# Altium PCB NZS_A4954_R2_0.PcbDoc
Units mil, origin at the board's own origin, x right, y up, seen from the top; angles counter-clockwise.
Board outline 1653.54 x 1653.54 mil, 2 copper layers (Top Layer, Bottom Layer); 60 components, 64 nets, 251 pads, 132 vias.
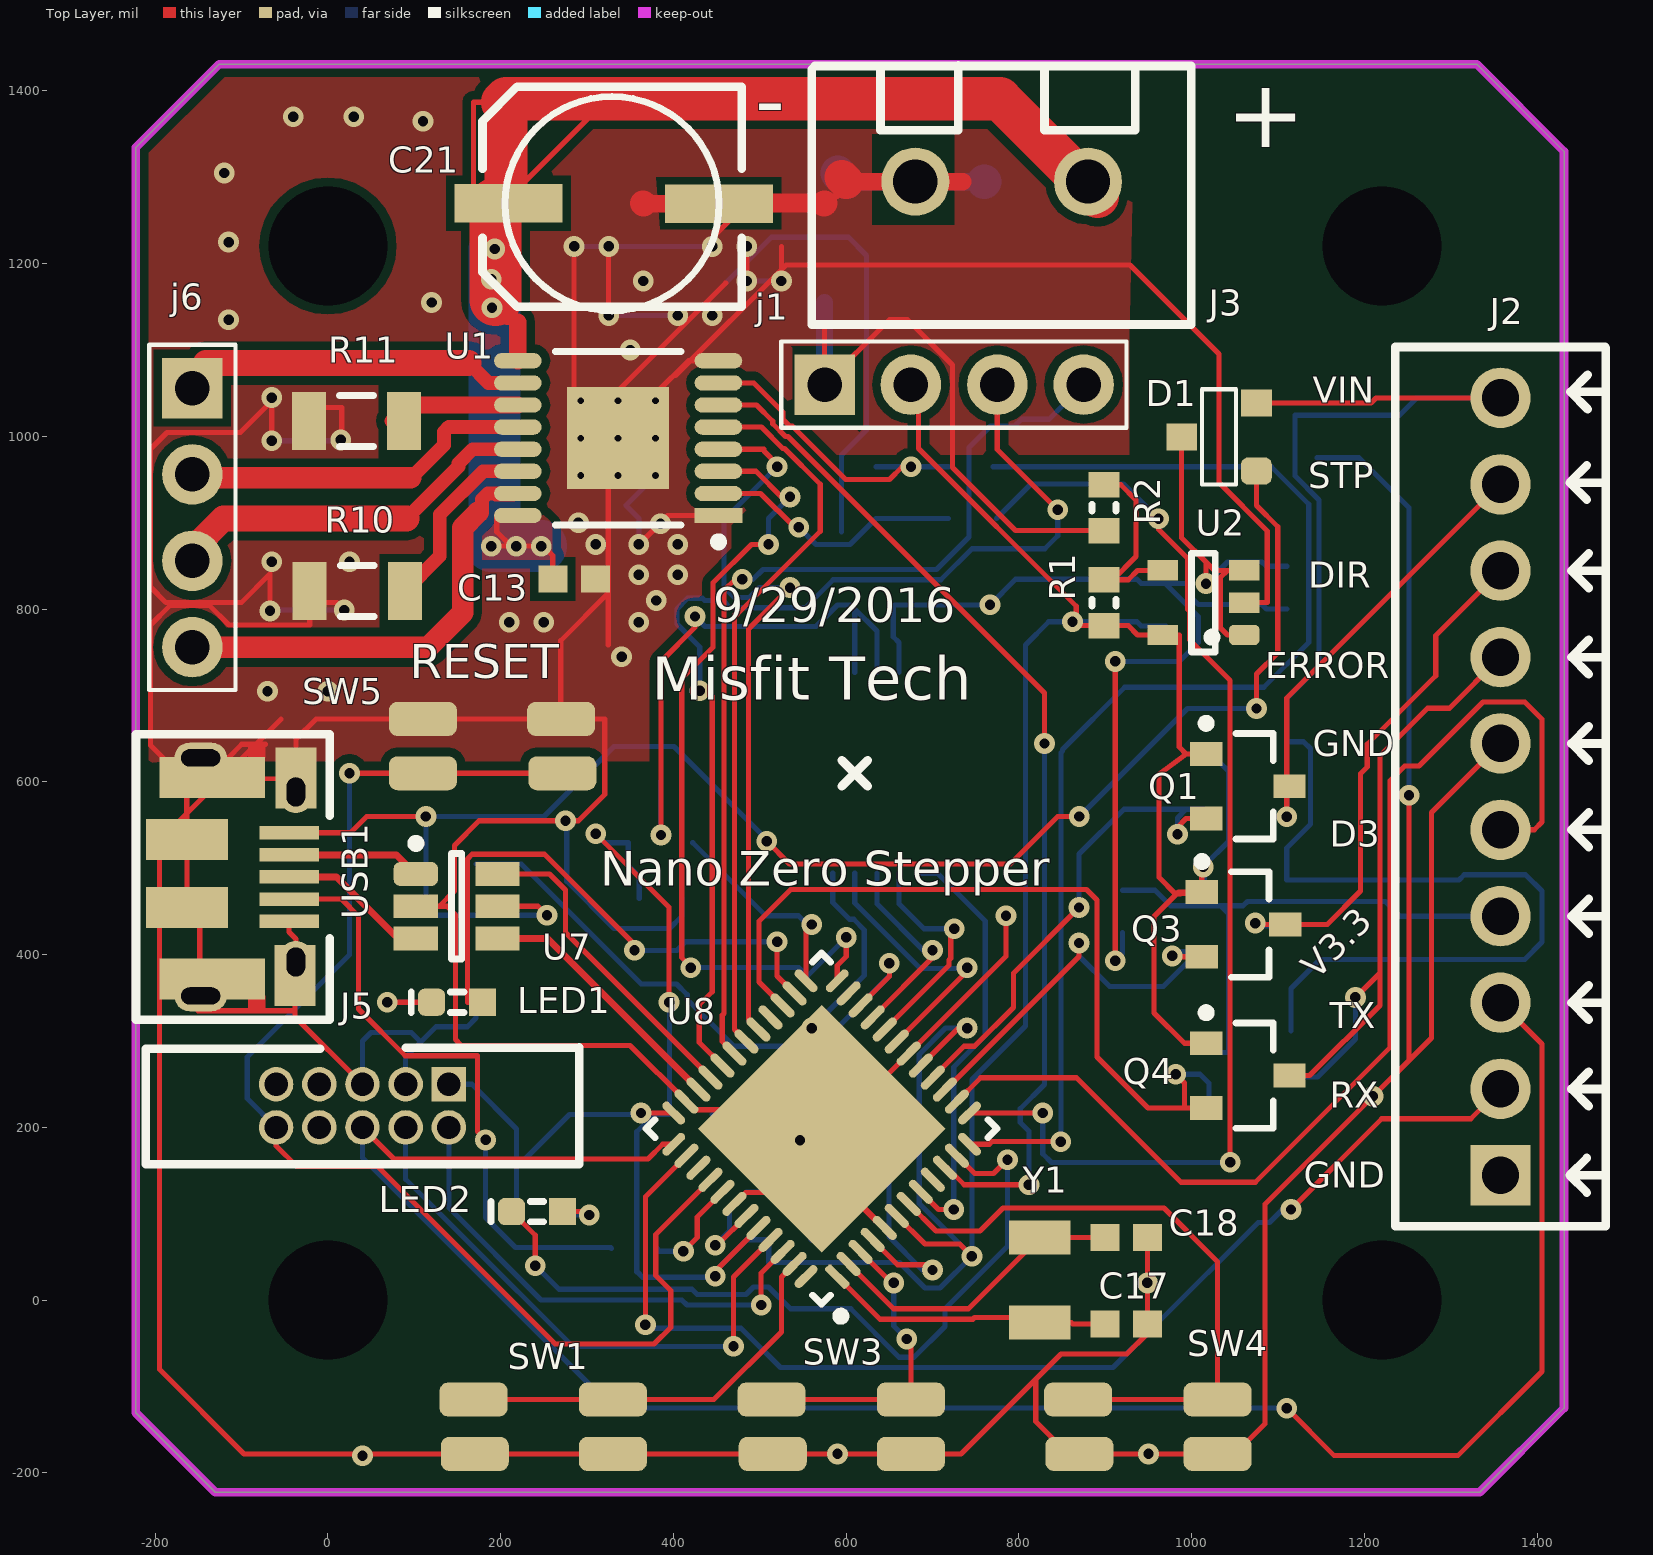
[diagram p0: Top Layer view]
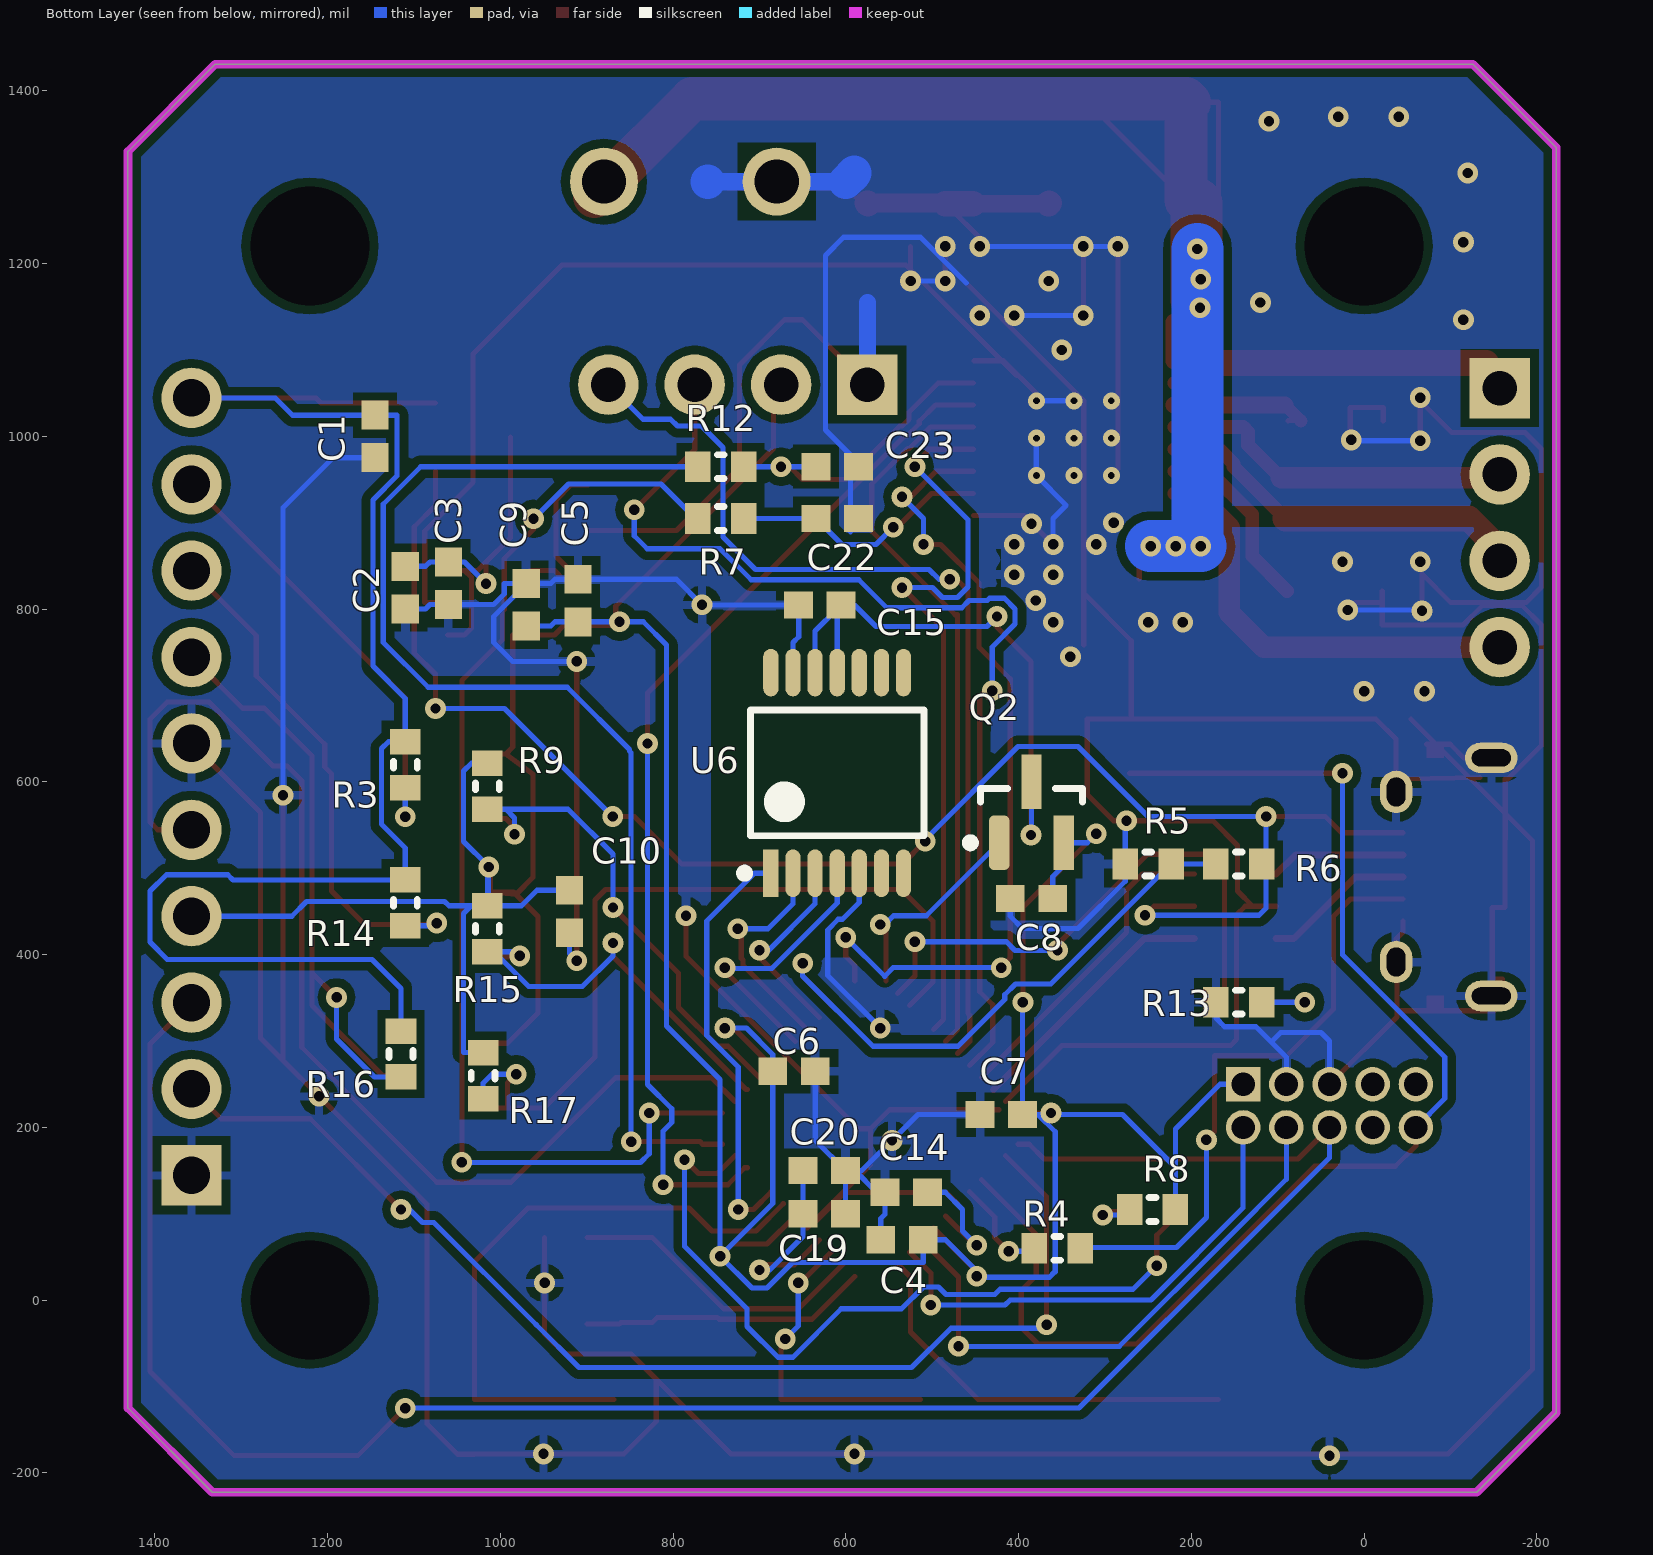
[diagram p1: Bottom Layer view, seen from below]
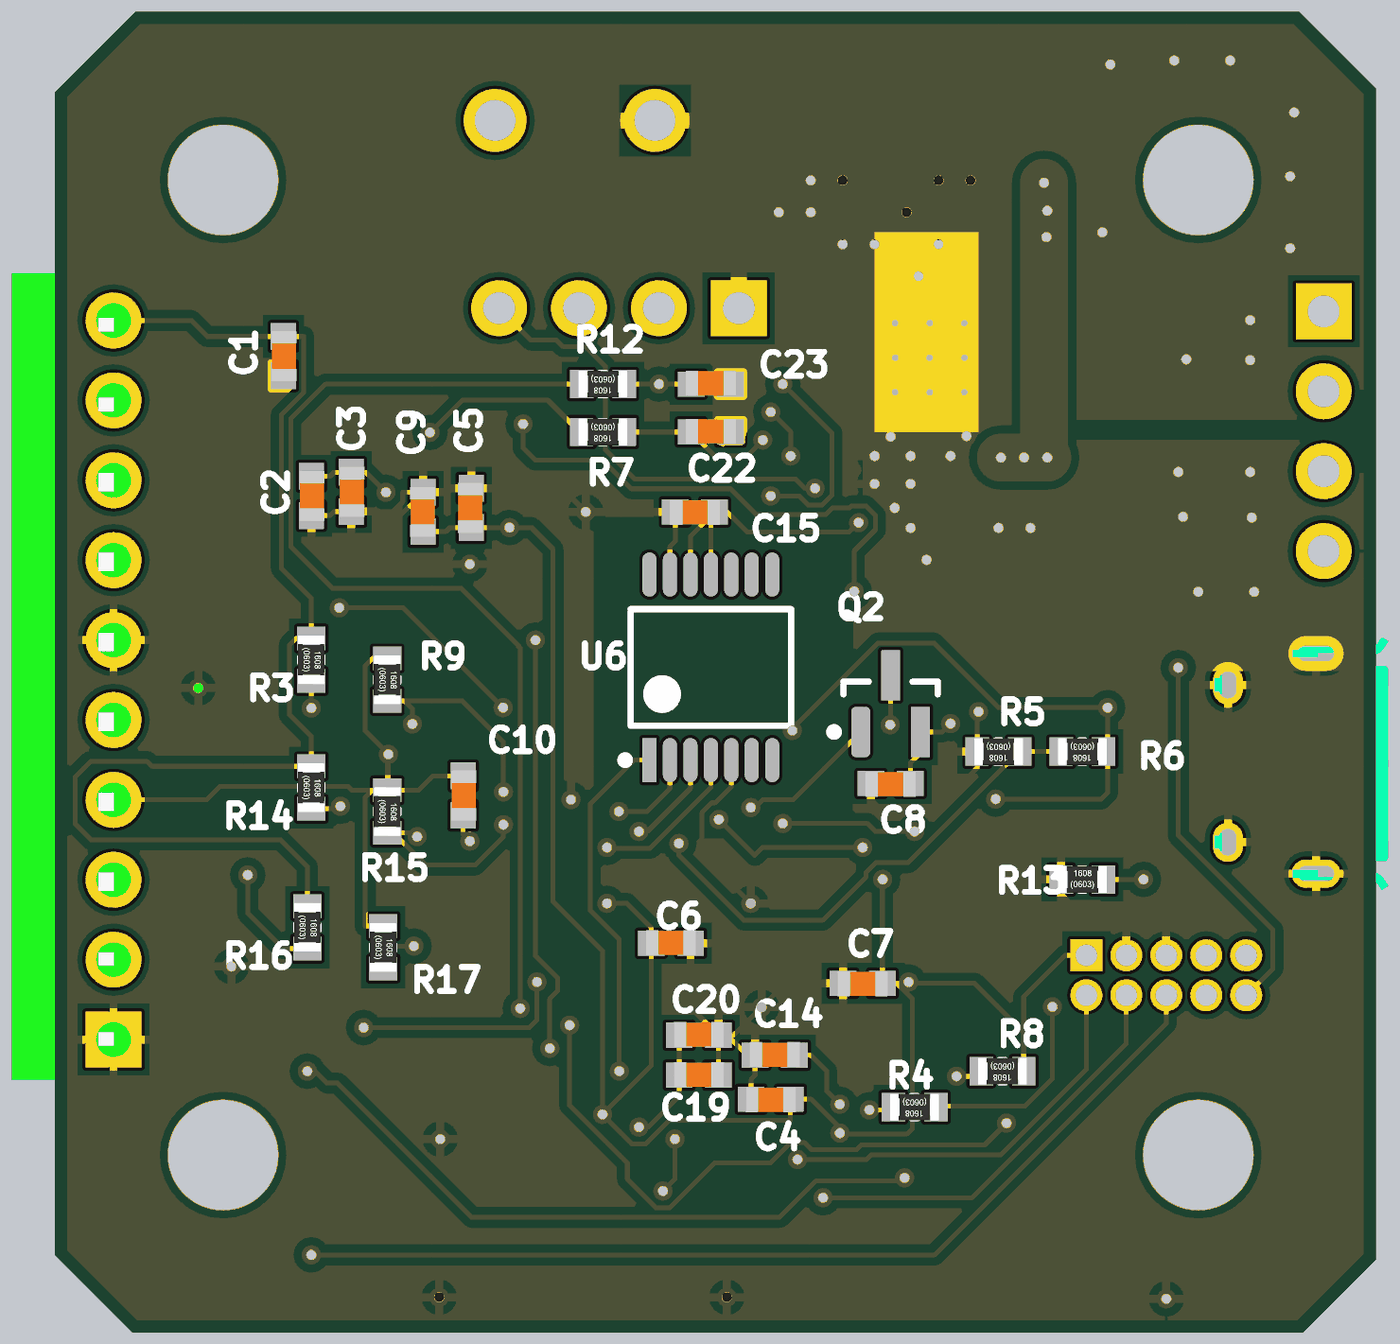
[diagram p2: 3D render of the assembled board from below, using the file's embedded part models]

## Layer stack, top to bottom
Top Solder: solder mask 0.4, Solder Resist, Dk 3.5
Top Layer: signal copper 1.4
Dielectric 1: dielectric 12.6, FR-4, Dk 4.8
Bottom Layer: signal copper 1.4
Bottom Solder: solder mask 0.4, Solder Resist, Dk 3.5

## Board outline
-130.44,-222.44 -222.44,-130.44 -222.44,1334.56 -125.9,1431.1 1330.02,1431.1 1431.1,1330.02 1431.1,-124.9 1333.56,-222.44

## Design rules (kind name [scope] priority, off if disabled: settings)
Clearance Clearance_1 [InNamedPolygon('Bottom Layer-GND')] p1: gap=15
Clearance [All] p2: gap=10 except(6: Track-Track Track-SMDPad Track-Via SMDPad-SMDPad)
MinimumSolderMaskSliver [All] p1: minsoldermaskwidth=1
PolygonConnect PolygonConnect_6 [All vs IsNamedPolygon('GND_bot')] p1: connectstyle=Direct reliefconductorwidth=10 reliefentries=4 polygonreliefangle="90 Angle" airgapwidth=10
PolygonConnect PolygonConnect_5 [All vs IsNamedPolygon('GND_bot')] p2: connectstyle=NoConnect reliefconductorwidth=10 reliefentries=4 polygonreliefangle="90 Angle" airgapwidth=10
PolygonConnect PolygonConnect_4 [All vs IsNamedPolygon('vmot')] p3: connectstyle=Direct reliefconductorwidth=10 reliefentries=4 polygonreliefangle="90 Angle" airgapwidth=10
PolygonConnect PolygonConnect_3 [All vs IsNamedPolygon('Top_GND')] p4: connectstyle=Direct reliefconductorwidth=10 reliefentries=4 polygonreliefangle="90 Angle" airgapwidth=10
PolygonConnect PolygonConnect_2 [All vs IsNamedPolygon('NETJ6-4')] p5: connectstyle=Direct reliefconductorwidth=10 reliefentries=4 polygonreliefangle="90 Angle" airgapwidth=10
PolygonConnect PolygonConnect_1 [All vs IsNamedPolygon('NETJ6-4')] p6: connectstyle=Relief reliefconductorwidth=10 reliefentries=4 polygonreliefangle="90 Angle" airgapwidth=10
PolygonConnect [All] p7: connectstyle=Relief reliefconductorwidth=10 reliefentries=4 polygonreliefangle="90 Angle" airgapwidth=10
RoutingVias [All] p1: holewidth=12 width=24 viastyle="Through Hole" minholewidth=12 minwidth=24 maxholewidth=28 maxwidth=50
SilkToSilkClearance [All] p1: silktosilkclearance=0
SilkToSolderMaskClearance [IsPad] p1: minsilkscreentomaskgap=1 clearancetoexposedcopper=TRUE
SolderMaskExpansion [All] p1: expansion=4
Width [All] p1: maxlimit=100 minlimit=6 preferedwidth=6
27 further rules are at their usual default settings.

## Components (designator, comment, footprint, x,y, rotation, side; value= is the part's Value field where it differs from the comment)
C1 "0.1uF" CAP_0603_H 1145,1000 r270 bottom
C2 "4.7uF" CAP_0603_H 1110,825 r270 bottom
C3 "0.1uF" CAP_0603_H 1060,830 r270 bottom
C4 "0.1uF" CAP_0603_H 535,70 r0 bottom
C5 "4.7uF" CAP_0603_H 910,810 r90 bottom
C6 "0.1uF" CAP_0603_H 660,265 r180 bottom
C7 "0.1uF" CAP_0603_H 420,215 r0 bottom
C8 "0.1uF" CAP_0603_H 385,465 r0 bottom
C9 "0.1uF" CAP_0603_H 970,805 r90 bottom
C10 "0.1uF" CAP_0603_H 920,450 r270 bottom
C13 "0.1uF" CAP_0603_H 285,835 r0 top
C14 "1uF" CAP_0603_H 530,125 r180 bottom
C15 "0.1uF" CAP_0603_H 630,805 r0 bottom
C17 "10pF" CAP_0603_H 924.13,-27.44 r0 top
C18 "10pF" CAP_0603_H 924.13,72.56 r0 top
C19 "4.7uF" CAP_0603_H 625,100 r180 bottom
C20 "0.1uF" CAP_0603_H 625,150 r180 bottom
C21 "100uF" UWT1V101MCL1GS 329,1270 r0 top
C22 "0.1uF" CAP_0603_H 610,905 r180 bottom
C23 "0.1uF" CAP_0603_H 610,965 r180 bottom
D1 "BAT-64-05W-E6327" BAT-64-05W-E6327 1075,960 r180 top
j1 "4_pin_100mils" 4_pin_100mils 875,1060 r90 top
J2 "OSTVN10A150" OSTVN10A150 1357.56,144.56 r90 top
J3 "OSTTC022162" OSTTC022162 880,1295 r270 top
J5 "Cortex_Debug" FTSH-105-01-L-D 40,225 r0 top
j6 "4_pin_100mils" 4_pin_100mils -157,756 r0 top
LED1 "LTST-C190KRKT" LTST-C190KRKT 120,345 r0 top
LED2 "LTST-C190KSKT" LTST-C190KSKT 212.56,102.56 r0 top
Q1 "BSS138" BSS138 1065,595 r0 top
Q2 "IRLML6401TRPBF" IRLML6401TRPBF_M 385,565 r90 bottom
Q3 "BSS138" BSS138 1060,435 r0 top
Q4 "BSS138" BSS138 1065,260 r0 top
R1 "DNP" RES_0603_H 898.56,807.56 r270 top
R2 "DNP" RES_0603_H 898.56,917.56 r90 top
R3 "10K" RES_0603_H 1110,620 r90 bottom
R4 "330" RES_0603_H 355,60 r180 bottom
R5 "10K" RES_0603_H 250,505 r180 bottom
R6 "5.1K" RES_0603_H 145,505 r180 bottom
R7 "1K" RES_0603_H 745,905 r180 bottom
R8 "1K" RES_0603_H 245,105 r180 bottom
R9 "10K" RES_0603_H 1015,595 r90 bottom
R10 "0.2" RES_1206_H 34,821 r180 top
R11 "0.2" RES_1206_H 33,1018 r180 top
R12 "1K" RES_0603_H 745,965 r180 bottom
R13 "1K" RES_0603_H 145,345 r0 bottom
R14 "10K" RES_0603_H 1110,460 r90 bottom
R15 "10K" RES_0603_H 1015,430 r90 bottom
R16 "10K" RES_0603_H 1115,285 r90 bottom
R17 "10K" RES_0603_H 1020,260 r90 bottom
SW1 "KMR231NG LFS" KMR231NG_LFS 330,-115 r180 top
SW3 "KMR231NG LFS" KMR231NG_LFS 675,-115 r180 top
SW4 "KMR231NG LFS" KMR231NG_LFS 1030,-115 r180 top
SW5 "KMR231NG LFS" KMR231NG_LFS 110,610 r0 top
U1 "A4954" A4954 336,998 r180 top
U2 "SPX5205M5-L" SPX5205M5-L 1013.56,807.56 r180 top
U6 "AS5047D" AS5047D 610,610.47 r90 bottom locked
U7 "USBLC6-2" USBLC6-2SC6 149,456 r0 top
U8 "ATSAMD21G18A-MF" ATSAMD21G18A-MF 571.56,198.56 r135 top
USB1 "10118194-0001LF" 10118194-0001LF -45,490 r270 top
Y1 "CM7V-T1A 32.768kHz 12.5pF 20ppm" FC-135-32.7680KA-A3 824.13,72.56 r270 top

## Footprints (in the part's own frame and the unit in brackets; to place one, negate y for a bottom-side part, rotate by r counter-clockwise, add the part's x,y. Pads: shape width x height; smd on the part's side, far side on the other; paste and mask are expansions set on the pad)
4_pin_100mils [mil]
  rect 70x70 hole 40: 1(0,300)
  round 70 hole 40: 2(0,200) 3(0,100) 4(0,0)
  silkscreen extent -50,-49 50,350
10118194-0001LF [mm]
  rect 0.4x1.75 smd: 1(-1.3,0) 2(-0.65,0) 3(0,0) 4(0.65,0) 5(1.3,0)
  oval 0.9x1.55 hole 0.5 slot 1.15 at 90 deg: 6(-3.5,-2.6) 6(3.5,-2.6)
  rect 1.2x3.1 smd: 6(-2.921,-2.261) 6(2.997,-2.261)
  rect 1.8x1.2 smd: 6(-2.906,0.206) 6(2.896,0.178)
  oval 1.25x0.95 hole 0.55 slot 0.85 at 0 deg: 6(-2.5,0.2) 6(2.5,0.2)
  rect 1.2x2.4 smd: 6(-1.1,-3) 6(0.9,-3)
  Top Layer region: 3.5,-0.7 3.9,-0.7 3.9,-1.2 3.5,-1.2
  Top Layer region: -3.9,-0.7 -3.5,-0.7 -3.5,-1.2 -3.9,-1.2
  silkscreen extent -4.2,-4.5 4.2,1.2, body extent -4.02,-4.9 4.02,0.68, height 2.78
A4954 [mm] "TSOP, 16-Leads, Body 5.50x4.40mm, Pitch 0.65mm, Thermal Pad 3.00x3.00mm, IPC Medium Density"
  rect 1.4x0.45 smd: 1(-2.95,2.275)
  oval 1.4x0.45 smd: 2(-2.95,1.625) 3(-2.95,0.975) 4(-2.95,0.325) 5(-2.95,-0.325) 6(-2.95,-0.975) 7(-2.95,-1.625) 8(-2.95,-2.275) 9(2.95,-2.275) 10(2.95,-1.625) 11(2.95,-0.975) 12(2.95,-0.325) 13(2.95,0.325) 14(2.95,0.975) 15(2.95,1.625) 16(2.95,2.275)
  rect 3x3 smd: 17(0,0)
  silkscreen extent -3.08,-2.55 1.85,3.17, body extent -2.25,-2.55 2.25,2.55, height 1.2
AS5047D [mm] "TSOP, 14-Leads, Body 5.00x4.40mm, Pitch 0.65mm, IPC Medium Density"
  rect 1.4x0.45 smd: 1(-2.95,1.95)
  oval 1.4x0.45 smd: 2(-2.95,1.3) 3(-2.95,0.65) 4(-2.95,0) 5(-2.95,-0.65) 6(-2.95,-1.3) 7(-2.95,-1.95) 8(2.95,-1.95) 9(2.95,-1.3) 10(2.95,-0.65) 11(2.95,0) 12(2.95,0.65) 13(2.95,1.3) 14(2.95,1.95)
  silkscreen extent -3.07,-2.55 1.85,2.85, body extent -2.25,-2.55 2.25,2.55, height 1.2
ATSAMD21G18A-MF [mm] "QFN, 48-Leads, Body 7.00x7.00mm, Pitch 0.50mm, Thermal Pad 5.15x5.15mm, IPC Medium Density"
  rrect50% 0.85x0.25 smd: 1(-3.4,2.75)
  oval 0.9x0.25 smd: 2(-3.375,2.25) 3(-3.375,1.75) 4(-3.375,1.25) 5(-3.375,0.75) 6(-3.375,0.25) 7(-3.375,-0.25) 8(-3.375,-0.75) 9(-3.375,-1.25) 10(-3.375,-1.75) 11(-3.375,-2.25) 26(3.375,-2.25) 27(3.375,-1.75) 28(3.375,-1.25) 29(3.375,-0.75) 30(3.375,-0.25) 31(3.375,0.25) 32(3.375,0.75) 33(3.375,1.25) 34(3.375,1.75) 35(3.375,2.25)
  oval 0.85x0.25 smd: 12(-3.4,-2.75) 25(3.4,-2.75) 36(3.4,2.75)
  oval 0.25x0.85 smd: 13(-2.75,-3.4) 24(2.75,-3.4) 37(2.75,3.4) 48(-2.75,3.4)
  oval 0.25x0.9 smd: 14(-2.25,-3.375) 15(-1.75,-3.375) 16(-1.25,-3.375) 17(-0.75,-3.375) 18(-0.25,-3.375) 19(0.25,-3.375) 20(0.75,-3.375) 21(1.25,-3.375) 22(1.75,-3.375) 23(2.25,-3.375) 38(2.25,3.375) 39(1.75,3.375) 40(1.25,3.375) 41(0.75,3.375) 42(0.25,3.375) 43(-0.25,3.375) 44(-0.75,3.375) 45(-1.25,3.375) 46(-1.75,3.375) 47(-2.25,3.375)
  rect 5.15x5.15 smd: 35(0,0)
  silkscreen extent -4.42,-3.65 3.65,3.65, body extent -3.5,-3.5 3.5,3.5, height 0.9
BAT-64-05W-E6327 [mm] "SOT23, 3-Leads, Body 3.0x2.5mm (max), Pitch 0.95mm, IPC High Density"
  rrect50% 0.9x0.8 smd: 1(0,0)
  rect 0.9x0.8 smd: 2(0,-2) 3(2.2,-1)
  silkscreen extent 0.6,-2.4 1.6,0.4
BSS138 [mm] "SOT23, 3-Leads, Body 2.92x2.40mm, Pitch 0.95mm, IPC Medium Density"
  rect 0.95x0.7 smd: 1(-1.225,0.95) 2(-1.225,-0.95) 3(1.225,0)
  silkscreen extent -1.35,-1.55 0.75,1.97, body extent -0.75,-1.56 0.75,1.56, height 1.2
CAP_0603_H [mm] "Chip Capacitor, 2-Leads, Body 1.6x0.8mm, IPC High Density"
  rect 0.85x0.8 smd: 1(-0.625,0) 2(0.625,0)
  body extent -0.8,-0.38 0.8,0.42, height 0.5
FC-135-32.7680KA-A3 [mm]
  rect 1x1.8 smd: 1(0,0) 2(2.5,0)
  body extent -0.33,-0.84 2.89,0.68, height 0.91
FTSH-105-01-L-D [mil]
  rect 40x40 hole 27: 1(100,25)
  round 40 hole 27: 2(100,-25) 3(50,25) 4(50,-25) 5(0,25) 6(0,-25) 7(-50,25) 8(-50,-25) 9(-100,25) 10(-100,-25)
  silkscreen extent -251,-68 251,67
IRLML6401TRPBF_M [mm] "SOT23, 3-Leads, Body 3.0x2.6mm (max), Pitch 0.95mm, IPC Medium Density"
  rrect50% 1.6x0.6 smd: 1(-0.9,0.95)
  rect 1.6x0.6 smd: 2(-0.9,-0.95) 3(0.9,0)
  silkscreen extent -1.02,-1.5 0.7,1.93, body extent -0.7,-1.52 0.7,1.52, height 1.12
KMR231NG_LFS [mm]
  rrect50% 2x1 smd: 1(0,0) 1(4.1,0) 2(0,1.6) 2(4.064,1.6)
  body extent -0.14,-0.74 4.46,2.26, height 2.1
LTST-C190KRKT [mm] "Chip Capacitor, 2-Leads, Body 1.6x0.8mm, IPC High Density"
  rect 0.8x0.8 smd: A(1.5,0)
  rrect50% 0.8x0.8 smd: K(0,0)
  silkscreen extent -0.6,-0.3 0.95,0.3, body extent -0.05,-0.4 1.55,0.4, height 0.8
LTST-C190KSKT [mm] "Chip Capacitor, 2-Leads, Body 1.6x0.8mm, IPC High Density"
  rect 0.8x0.8 smd: A(1.5,0)
  rrect50% 0.8x0.8 smd: K(0,0)
  silkscreen extent -0.6,-0.3 0.95,0.3, body extent -0.05,-0.4 1.55,0.4, height 0.8
OSTTC022162 [mm]
  round 2 hole 1.3: 1(0,0) 2(0,-5.08)
  silkscreen extent -3.42,-8.12 4.2,3.04
OSTVN10A150 [mil]
  rect 70x70 hole 43.31: 1(0,0)
  round 70 hole 43.31: 2(100,0) 3(200,0) 4(300,0) 5(400,0) 6(500,0) 7(600,0) 8(700,0) 9(800,0) 10(900,0)
  silkscreen extent -59,-122 959,122, body extent -50,-127 959,118, height 340
RES_0603_H [mm] "Chip Resistor, 2-Leads, Body 1.6x0.8mm, IPC High Density"
  rect 0.75x0.9 smd: 1(-0.675,0) 2(0.675,0)
  silkscreen extent -0.1,-0.35 0.1,0.35, body extent -0.78,-0.43 0.78,0.43, height 0.45
RES_1206_H [mm] "Chip Resistor, 2-Leads, Body 3.1x1.6mm, IPC High Density"
  rect 1x1.7 smd: 1(-1.4,0) 2(1.4,0)
  silkscreen extent -0.5,-0.75 0.5,0.75, body extent -1.65,-0.87 1.65,0.88, height 0.6
SPX5205M5-L [mm] "SOT23, 5-Leads, Body 2.9x3.0mm (max), Pitch 0.95mm, IPC High Density"
  rrect50% 0.9x0.6 smd: 1(-1.2,0.95)
  rect 0.9x0.6 smd: 2(-1.2,0) 3(-1.2,-0.95) 4(1.2,-0.95) 5(1.2,0.95)
  silkscreen extent -0.38,-1.45 0.35,1.45, body extent -0.8,-1.45 0.8,1.45, height 1.45
USBLC6-2SC6 [mm] "SOT23, 6-Leads, Body 2.9x1.6mm, Pitch 0.95mm, Lead Span 2.7mm, IPC Low Density"
  rrect50% 1.3x0.7 smd: 1(-1.2,0.95)
  rect 1.3x0.7 smd: 2(-1.2,0) 3(-1.2,-0.95) 4(1.2,-0.95) 5(1.2,0) 6(1.2,0.95)
  silkscreen extent -1.32,-1.55 0.15,1.97, body extent -0.9,-1.55 0.9,1.55, height 1.45
UWT1V101MCL1GS [mil]
  rect 125x45 smd: 1(-120,0) 2(124,-0.57)
  silkscreen extent -150,-125 150,135, body extent -150,-125 150,135, height 315

## Part data
C1 C3 C4 C6 C7 C8 C9 C10 C13 C15 C20 C22 C23: library part altiumdb529bf947b98393.42967747, "CAP CER 0.1UF 50V Y5V 0603"
C2 C5 C19: library part altiumdb4ee8d107ce20d3.65865655, "CAP 0603 CER 4.7UF 6.3V X5R 10%"
C14: library part altiumdb4ee8b0b72ecfe9.85374024, "CAP 0603 CER 1UF 10V X5R 10%"
C17 C18: library part altiumdb4ee8b063d08416.68377278, "CAP 0603 CER 10PF 50V C0G 5%"
C21: library part altiumdb57a880e8344183.38641875, "100uF 35V SMD"
D1: library part altiumdb4f1b209379f822.22085624, "DIODE SCHOTTKY 40V SOT-323 250mA"
j1 j6: library part altiumdb50250c9a771e29.42661008
J2: library part altiumdb567859247e8a11.17618190, "CONN TERM BLOCK 2.54MM 10POS PCB"
J3: library part altiumdb4f85748e7138c0.76964249, "TERM BLOCK 5.08MM VERT 2POS PCB"
J5: library part altiumdb4feb1a682396d4.11944837, "CONN HEADER 10POS DUAL .05&quot; T/H"
LED1: library part altiumdb4f59f5b2e3b411.05953718, "LED SUPER RED CLEAR 0603 SMD 20mA Vf=2V"
LED2: library part altiumdb52dbc15523a908.74373465, "LED YELLOW CLEAR 0603 SMD"
Q1 Q3 Q4: library part altiumdb57eceeefb79952.37783215
Q2: library part altiumdb4f097f24c87689.72269489, "MOSFET P-CH 12V 4.3A SOT-23"
R3 R5 R9 R14 R15 R16 R17: library part altiumdb4ee8dc331cbc98.19926137, "RES 0603 TKF 10K 5% 1/10W"
R4: library part altiumdb4ee8dc965f2f62.61392404, "RES 0603 TKF 330R 5% 1/10W"
R6: library part altiumdb4ee8dcacc79f57.47125618, "RES 0603 TKF 5.1K 1% 1/10W"
R7 R8 R12 R13: library part altiumdb4ee8dc53e1b436.35151719, "RES 0603 TKF 1K 1% 1/10W"
R10 R11: library part altiumdb52db39dc769f41.69333525, "RES 0.2 OHM 0.25W 1% 1206 SMD"
SW1 SW3 SW4 SW5: library part altiumdb5720ffb537d454.34298613
U1: library part altiumdb57cf0e2bc99638.36445338
U2: library part altiumdb4f9183a00484d4.75542184, "IC REG LDO ADJ 150MA LN SOT23-5"
U6: library part altiumdb5786b44c08eb91.84503477
U7: library part altiumdb506c612ca2ae40.60197528, "TVS Diode Arrays ESD Protection Low Cap"
U8: library part altiumdb5720cf6a19f4d8.76560122
USB1: library part altiumdb561d4bc7e25b70.41497989, "Connector Receptacle USB - micro B 2.0 5 Position Surface Mount, Right Angle, Horizontal"
Y1: library part altiumdb5018268f58fb89.22462782, "CRYSTAL 32.7680KHZ 12.5PF SMD"

## Free pads (board coordinates)
  oval 47.24x94.49 hole 137.8: 0(0,0) 0(0,1220.47) 0(1220.47,0) 0(1220.47,1220.47)

## Via types
v1: diameter 24, hole 12, Top Layer to Bottom Layer, tented both sides, 123 vias
v2: diameter 19.68, hole 7.87, Top Layer to Bottom Layer, tented both sides, 9 vias

## Nets (pads, with @x,y where several pads share a name; then routed paths per layer and width w, separated by ;. In a path a pad name is that pad's centre, name@x,y a point inside that pad or via, vN(x,y) a via of type N, cw(c..) or ccw(c..) an arc to the next point about the centre after c; other vN are vias at no path point)
\RESET: J5.10 SW5.1 U8.40 | length 1504.6
  Top Layer w6: J5.10 -60,178.88 -36.12,155 57.42,155 263.21,-50.79 377.56,-50.79 396.81,-31.54 396.81,11.31 379.56,28.56 379.56,76.16 U8.40 ; v1(25,610) 110,610 SW5.1@271.42,610
  Bottom Layer w6: J5.10 -93.44,233.44 -93.44,281.56 25,400 v1(25,610)
A0: SW3.1 U8.3 | length 372.8
  Top Layer w6: SW3.1@513.58,-115 675,-115 675,-40 v1(670,-45) ; U8.3 652.68,20 v1(655,20) v1@655,15
  Bottom Layer w6: v1(655,20) 655,-30 v1(670,-45)
A1: SW4.1 U8.7 | length 728.2
  Top Layer w6: U8.7 704.04,80 755,80 781.56,106.56 793.46,106.56 967.89,106.56 1030,44.45 1030,-115 SW4.1@868.58,-115
A2: U6.1 U8.8 | length 492.9
  Top Layer w6: U8.8 706.88,105 v1(724.56,105)
  Bottom Layer w6: U6.1 705.67,494.33 761,439 761,306.3 724.56,269.86 v1(724.56,105)
A3: U8.9
A4: U1.6 U8.10 | length 1207.9
  Top Layer w6: U1.6 496.17,1036.39 515,1017.56 515,1014.64 529.64,1000 532.56,1000 829.56,703 v1(829.56,644.56) ; U8.10 716.95,153.32 736.71,133.56 v1(811.56,133.56)
  Bottom Layer w6: v1(811.56,133.56) 811.56,195.56 801.56,205.56 801.56,221.56 829.56,249.56 v1(829.56,644.56)
A5: SW1.1 U8.47 | length 473.8
  Top Layer w6: SW1.1@168.58,-115 330,-115 446.7,-115 525.02,-36.68 525.02,26.74 U8.47
AREF: C19.1 C20.1 U8.4 | length 226.5
  Top Layer w6: U8.4 659.52,41 694,41 v1(700,35)
  Bottom Layer w6: C20.1 C19.1 649.61,73.56 688.17,35 v1(700,35)
D0: Q1.2 R9.1 U8.16 | length 581.3
  Top Layer w6: U8.16 736.6,294 748.7,294 793.56,338.86 793.56,378.56 v1(869.56,454.56) ; v1(983.56,539.56) 983.56,547.6 993.56,557.6 Q1.2
  Bottom Layer w6: v1(869.56,454.56) 869.56,516.43 921.56,568.43 993.56,568.43 ; v1(983.56,539.56) 983.56,558.43 993.56,568.43 ; R9.1 993.56,568.43
D1: Q3.2 R15.1 U8.15 | length 493.2
  Top Layer w6: U8.15 715.47,243.8 869.56,397.89 v1(869.56,413.56) ; v1(977.56,398.56) 978.52,397.6 Q3.2
  Bottom Layer w6: v1(869.56,413.56) 869.56,398.56 905.1,363.02 967.02,363.02 R15.1@1007.43,403.43 ; v1(977.56,398.56) 982.43,403.43 R15.1@1007.43,403.43 ; R15.1 R15.1@1007.43,403.43
D2: U8.23
D3: J2.5 U8.14 | length 1329.1
  Top Layer w6: U8.14 755.79,257.52 866.6,257.52 987.56,136.56 1073.56,136.56 1229.89,292.89 1229.89,601.56 1246.74,618.41 1263.03,618.41 1337.17,692.56 1385.56,692.56 1405.56,672.56 1405.56,553.56 1396.56,544.56 J2.5
D4: R7.1 U8.13 | length 1353.2
  Top Layer w6: U8.13 v1(827.56,216.65) ; v1(961.56,904.56) 961.56,892.63 995.56,858.63 995.56,799.56 997.56,797.56 997.56,764.56 1044.56,717.56 v1(1044.56,159.56)
  Bottom Layer w6: R7.1@774.12,905 814.12,945 921.12,945 v1(961.56,904.56) ; v1(827.56,216.65) 827.56,169.56 837.56,159.56 v1(1044.56,159.56)
D5: U1.3 U8.24 | length 965.2
  Top Layer w6: v1(420,385) 420,386.12 409.56,396.56 409.56,719.56 446,756 446,830.7 490.3,875 v1(510,875) ; U1.3 495.69,959.62 525.3,930 v1(535,930) ; U8.24 589.65,387.65 600,398 v1(600,420)
  Bottom Layer w6: v1(420,385) 545,385 555,375 v1(600,420) ; v1(510,875) 510,905 v1(535,930)
D6: U1.4 U8.29 | length 871.6
  Top Layer w6: U1.4 504.79,985.21 504.79,983.05 520,967.85 v1(520,965) ; U8.29 487,324.88 487,777 v1(535,825)
  Bottom Layer w6: v1@520,959.7 v1(520,965) 458.56,903.56 458.56,825.86 470.86,813.56 488.26,813.56 499.7,825 v1(535,825)
D7: U1.5 U8.30 | length 839
  Top Layer w6: U1.5 501.88,1010.8 526.67,986 528.7,986 570,944.7 570,890.3 473.26,793.56 470.56,793.56 470.56,313.48 U8.30
D8: LED2.K U8.11 | length 911
  Top Layer w6: LED2.K 240,75.12 v1(240,40) ; U8.11 748.83,146.56 770.74,146.56 v1(786.74,162.56)
  Bottom Layer w6: v1(240,40) 267.44,12.56 421.56,12.56 427.56,6.56 463.56,6.56 484,6.56 492.86,15.42 510.26,15.42 535.68,-10 605.3,-10 661.3,-66 678.7,-66 714.4,-30.3 714.4,-10 786.74,62.34 v1(786.74,162.56)
D9: R12.1 U8.12 | length 1441.8
  Top Layer w6: U8.12 765.74,180.47 768.84,183.56 v1(848.56,183.56)
  Bottom Layer w6: R12.1@770,965 1092.12,965 1135.56,921.56 1135.56,761.56 1083.56,709.56 922.56,709.56 850.56,637.56 850.56,635.86 848.56,633.86 v1(848.56,183.56)
D10: Q4.2 R17.1 U8.27 | length 971.8
  Top Layer w6: U8.27@515.56,352 U8.27 499,368.55 499,438.7 535.86,475.56 878.26,475.56 890.56,463.26 890.56,281.56 949.52,222.6 991.56,222.6 ; v1(981.56,261.56) 991.56,251.56 991.56,222.6 ; Q4.2 991.56,222.6
  Bottom Layer w6: v1(981.56,261.56) 1009.56,261.56 1020,251.12 R17.1
D11: Q2.1 U8.25 | length 247.6
  Top Layer w6: U8.25 553.47,433.47 555,435 v1(560,435)
  Bottom Layer w6: Q2.1 506.97,445 544.7,445 554.7,435 v1(560,435)
D12: U8.28
D13: LED1.A U8.26 | length 666.5
  Top Layer w6: LED1.A 161.56,345 161.56,510.82 166.92,516.18 250.79,516.18 355,411.97 v1(355,405) ; v1(520,415) 520,375.39 U8.26
  Bottom Layer w6: v1(355,405) 404,405 414,415 v1(520,415)
DIR: J2.8 Q3.3 R14.1 | length 614.5
  Top Layer w6: v1(1073.56,436.56) 1075.12,435 Q3.3 1157,435 1195.56,473.56 1195.56,609.56 1203.21,617.21 1203.21,643.53 1282.56,722.88 1282.56,769.56 J2.8
  Bottom Layer w6: v1(1073.56,436.56) 1076.69,433.43 R14.1
ERROR: J2.7 Q4.3 R16.1 | length 795.4
  Top Layer w6: Q4.3 1136.56,260 1217.89,341.33 1217.89,378.89 ; v1(1189.56,350.56) 1217.89,378.89 ; J2.7 1298.41,685.41 1272.88,685.41 1217.89,630.41 1217.89,378.89
  Bottom Layer w6: R16.1 1145.56,258.43 1189.56,302.43 v1(1189.56,350.56)
GND: C1.2 C2.2 C3.2 C4.2 C5.2 C6.2 C7.2 C8.2 C9.2 C10.2 C13.2 C14.1 C15.2 C17.2 C18.2 C19.2 C20.2 C21.2 C22.2 C23.2 j1.1 J2.1 J2.6 J3.2 J5.3 J5.5 R2.1 R5.1 R10.2 R11.2 R13.2 SW1.2 SW3.2 SW4.2 SW5.2 U1.1 U1.8 U1.17 U2.2 U6.5 U6.13 U7.2 U8.5 U8.18 U8.35 U8.42 USB1.5 USB1.6 | length 15644.4
  Top Layer w6: USB1.6@-147.36,627.8 -115.44,627.8 -99.69,643.54 -72.56,643.54 ; USB1.6@-134,605 -47.52,603.56 USB1.6@-37.13,603.39 ; v1@-68,1038 -101.44,1004.56 -186.44,1004.56 -205.44,985.56 -205.44,825.56 -187.44,807.56 -100.44,807.56 -67,841 v1(-67,798) ; v1(-65,995) v1@-65,1035 ; -54.44,672.56 -195,532 -195,-80 -97.01,-177.99 170,-177.99 330,-177.99 515,-177.99 675,-177.99 733.01,-177.99 848.56,-62.44 924.74,-62.44 948.74,-38.44 C17.2 C18.2 ; USB1.5 -45,426.12 -37.13,418.25 -37.13,391.57 -37.13,383.43 -38,382.56 -38,376 -38,335 ; USB1.6@-37.13,588.43 -36.88,603.38 USB1.6@-37.13,603.39 ; R11.2 -22.12,1033.56 16,1033.56 16,997 v1(15,996) ; R10.2 R10.2@-21.12,807.56 ; v1(19,799) 10.44,807.56 R10.2@-21.12,807.56 ; J5.5 -38,328 -38,335 ; U7.2 129,456 ; U1.17@285,962.39 v1(285,1220) ; 324.56,758.56 324.56,1041.56 460.56,1177.56 ; 325,819 269.56,763.56 SW5.2@269.56,672.99 ; 325,889.56 U1.17@325,1041.31 ; v1(325,1140) v1@325,1210 ; v1(360,875) 393.43,908.43 U1.1 ; v2(379.31,1041.31) 379.31,1049.56 417.32,1087.57 U1.8@451.56,1087.57 ; 402.56,1070.56 530.56,1198.56 928.56,1198.56 1031.56,1095.56 1031.56,946.56 1087.56,890.56 1087.56,807.56 U2.2 ; U8.35@414.97,229.88 349.85,295 154.33,295 147.56,301.77 147.56,446 137.56,456 129,456 ; U8.35@422.56,220.56 549.56,220.56 U8.35@571.56,198.56 ; v1@440,1225 484.43,1269.43 493,1278 590,1278 ; U8.42 483.64,124.56 601.56,124.56 635.56,90.56 U8.5@637.8,90.56 ; v1(485,1180) v1(485,1220) ; v1(525,1180) 525,1220 ; 575,1130 j1.1 650,1135 670.88,1135 723,1082.88 723,963.97 795.99,890.99 R2.1 ; U8.5 U8.5@637.8,90.56 ; v1(785,445) 785,398.08 U8.18 585.48,198.56 U8.35@571.56,198.56 ; 819.56,-94.44 819.56,-140.44 857.11,-177.99 870,-177.99 SW4.2@1030,-177.99 ; v1(911.56,393) v1(911.56,739.56) ; SW4.2@1030,-178.44 1049.56,-178.44 1085,-143 1085,111 v1(1210,236) 1251.56,277.56 ; v1(1251.56,584.56) 1251.56,277.56 ; J2.6 1277.56,564.56 1277.56,303.56 1251.56,277.56 ; -38,335 -150.44,335 -159.88,344.44 -159.88,372 -148.44,372 -148.44,454.57 -163.11,454.57 -163.11,533.31 -163.44,533.31 -163.44,603.56 -166.44,603.56 -205.44,642.56 -205.44,781.56 -182.44,804.56 -137.44,804.56 -114.44,781.56 -21.12,781.56 R10.2@-21.12,807.56 ; USB1.6@-37.13,603.39 -37.13,603.56 -36.87,603.56 -36.87,604.43 -36.87,649.56 -13.44,672.99 110,672.99 SW5.2@269.56,672.99 ; 129,456 146.56,473.56 146.56,526.56 175,555 290,555 320.56,585.56 320.56,672.99 270,672.99 SW5.2@269.56,672.99 ; U8.35@571.56,198.56 571.56,156.8 U8.5@637.8,90.56
  Top Layer w20: 365.57,1269.43 C21.2 ; C21.2@484.43,1269.43 574.43,1269.43 ; 600,1295 J3.2 735,1295
  Top Layer w30: 365,1270 365.57,1269.43 ; C21.2 C21.2@484.43,1269.43 ; 574.43,1269.43 575,1270
  Top Layer w40: 595,1300 600,1295
  Bottom Layer w6: v1(-67,798) -66,799 v1(19,799) ; v1(-65,995) 14,995 v1(15,996) ; J5.5@52.5,250 J5.5 40,300 50,310 96.57,310 107.51,299.07 ; J5.3@77.5,250 J5.3 90,281.56 125.02,316.58 161.56,316.58 171.58,326.59 R13.2 ; v1(275,555) 276.57,553.43 R5.1 276.57,485 331.18,430.39 395.39,430.39 409.61,444.61 C8.2 ; v1(285,1220) v1(445,1220) ; v1(325,1140) v1(405,1140) ; v2(336,1041.31) v2(379.31,1041.31) ; v1(360,875) 360,905 345,920 345,920.39 v2(379.31,954.69) ; v2(379.31,998) 379.56,997.75 v2@379.56,954.69 ; C7.2 516.56,215 581.56,150 C20.2@589.56,150 ; 460.56,1177.56 513.56,1230.56 602.56,1230.56 623.56,1209.56 623.56,1007.56 594.56,978.56 C22.2@594.56,889.56 ; v1(485,1180) v1(525,1180) ; C4.2 559.61,94.56 554.61,99.56 C14.1 564.56,125 C20.2@589.56,150 ; v1(560,315) 621,376 621,428.7 608.7,441 604,441 584.41,460.59 U6.5 ; C19.2 C20.2 ; C6.2 635.39,185 C20.2 ; U6.13 661.18,761.56 654.61,768.14 C15.2 v1(766.56,805) 796.17,834.61 C5.2 936.56,834.61 941.56,829.61 C9.2 ; v1(911.56,393) 920,401.44 C10.2 ; v1(911.56,739.56) 985.56,739.56 1007.56,761.56 1007.56,791.56 969.51,829.61 C9.2 ; C2.2 1086.56,800.39 1081.56,805.39 C3.2 1007.73,805.39 995.56,817.56 995.56,829.61 C9.2 ; C1.2 1193.56,975.39 1251.56,917.39 v1(1251.56,584.56) ; C20.2@589.56,150 C20.2
  Bottom Layer w20: j1.1 575,1155 ; 600,1295 J3.2 760,1295
  Bottom Layer w40: 590,1305 600,1295
  other v1: 40,-180 590,-177.99 950,-177.99 948.74,20 546.56,185 -70,705 0,705 340,745 210,785 250,785 360,785 380,810 360,840 405,840 -65,855 25,855 310,875 405,875 290,900 385,899.06 -65,1045 350,1100 -115,1135 445,1140 120,1155 365,1180 325,1220 -115,1225 -120,1305 110,1365 -40,1370 30,1370
  other v2: 292.69,954.69 336,954.69 292.69,998 336,998 292.69,1041.31
MISO: U6.3 U8.21 | length 228.6
  Top Layer w6: U8.21 700,396.6 v1(700,405)
  Bottom Layer w6: U6.3 635.59,458.86 689.45,405 v1(700,405)
MOSI: U6.4 U8.19 | length 315.7
  Top Layer w6: U8.19 740,380.92 v1(740,385)
  Bottom Layer w6: U6.4 610,459.7 685.7,384 739,384 v1(740,385)
NetC2_1: C2.1 C3.1 D1.3 U2.1 U2.3 | length 436.2
  Top Layer w6: D1.3 988.39,882.78 1016.56,854.61 ; v1(1016.56,829.61) 1016.56,854.61 ; U2.1 1041.56,770.16 1033.56,778.16 1033.56,836.96 1041.56,844.96 ; U2.3 1041.56,844.96 ; 1016.56,854.61 1026.2,844.96 1041.56,844.96
  Bottom Layer w6: v1(1016.56,829.61) 1041.56,854.61 C3.1 1081.56,854.61 1086.56,849.61 C2.1
NetC14_2: C14.2 U8.43 | length 147
  Top Layer w6: v1(448.56,63.56) 450.48,63.56 U8.43
  Bottom Layer w6: v1(448.56,63.56) 465,80 465,105 485,125 C14.2
NetC15_1: C15.1 Q2.3 U6.11 U6.12 | length 691.6
  Top Layer w6: v1(385.56,538.56) 385.56,739.56 425,779 v1(425,791.56)
  Bottom Layer w6: Q2.3 385,539.12 v1(385.56,538.56) ; v1(425,791.56) 436.56,780 565,780 590,805 C15.1 C15.1@610,800.39 ; U6.11 C15.1@610,800.39 ; U6.12 635.59,774.8 C15.1@610,800.39
NetC17_1: C17.1 U8.1 Y1.2 | length 334.2
  Top Layer w6: U8.1 639,-22 746.54,-22 748.54,-20 818.27,-20 Y1.2 860.56,-25.87 862.13,-27.44 C17.1
NetC18_1: C18.1 U8.2 Y1.1 | length 352.4
  Top Layer w6: U8.2 654.85,-10 741.57,-10 Y1.1 C18.1
NetC22_1: C22.1 R7.2 U1.2 | length 303.2
  Top Layer w6: U1.2 500.98,934.02 540,895 v1(545,895)
  Bottom Layer w6: v1(545,895) 565,875 604.61,875 C22.1 688.43,905 R7.2
NetC23_1: C23.1 R12.2 U1.7 | length 364.2
  Top Layer w6: U1.7 493.02,1061.98 527,1028 527,1019.61 534.61,1012 537.53,1012 599.53,950 650,950 665,965 v1(675,965)
  Bottom Layer w6: C23.1 689.44,965 693.43,965 R12.2
Netj6_1: j6.1 U1.10 | length 406
  Top Layer w6: j6.1 -155,1058 j6.1@-155,1071
  Top Layer w10: j6.1@-155,1071 j6.1@-141,1085
  Top Layer w16: 163,1085 186.02,1061.98 U1.10
  Top Layer w30: j6.1@-141,1085 163,1085
Netj6_2: j6.2 U1.12 | length 411.7
  Top Layer w16: j6.2 j6.2@-153,952 ; 96,952 134.21,990.21 134.21,1005.21 139.8,1010.8 U1.12
  Top Layer w25: j6.2@-153,952 96,952
Netj6_3: j6.3 U1.13 | length 441.3
  Top Layer w6: j6.3 -155,856 j6.3@-155,871
  Top Layer w16: 91,905 151.14,965.14 151.14,968.73 167.62,985.21 U1.13
  Top Layer w30: j6.3@-155,871 -121,905 91,905
Netj6_4: j6.4 U1.15 | length 544.8
  Top Layer w10: U1.15@194.07,929.43 215.27,929.43 U1.15
  Top Layer w16: 173.8,912.3 178.3,912.3 178.3,927.3 185.02,934.02 U1.15
  Top Layer w25: j6.4 116,756 156,796 156,894.5 173.8,912.3
NetLED1_K: LED1.K R13.1 | length 101.3
  Top Layer w6: v1(68.56,345) LED1.K
  Bottom Layer w6: v1(68.56,345) R13.1
NetLED2_A: LED2.A R8.1 | length 70
  Top Layer w6: LED2.A 298.56,102.56 v1(302.56,98.56)
  Bottom Layer w6: R8.1 271.57,98.56 v1(302.56,98.56)
NetR1_1: R1.1 R2.2 U2.4 | length 220
  Top Layer w6: R1.1 R1.1@908.86,834.13 ; R2.2 917.99,944.13 935.56,926.56 935.56,860.83 R1.1@908.86,834.13 ; U2.4 937.39,844.96 926.56,834.13 R1.1@908.86,834.13
NetR4_2: R4.2 USB1.4 | length 708
  Top Layer w6: USB1.4 15.56,464.41 35.56,444.41 35.56,337 89.56,283 173,283 173,195.12 v1(182.56,185.56)
  Bottom Layer w6: v1(182.56,185.56) 182.56,95.66 217.22,61 327.43,61 R4.2
NetR5_2: R5.2 R6.1 U8.22 | length 680.1
  Top Layer w6: U8.22 616.8,341.8 650,375 v1(650,390)
  Bottom Layer w6: R6.1 R5.2 223.82,505 362.82,366 403.7,366 416,353.7 416,348 470,294 568.7,294 650,375.3 v1(650,390)
NetR10_1: R10.1 U1.14 | length 216.4
  Top Layer w16: R10.1 129.5,861.38 129.5,909.61 179.5,959.62 U1.14
NetR11_1: R11.1 U1.11 | length 170.5
  Top Layer w6: R11.1@73.12,1018 73.12,1018.56 73.68,1018.56 88.12,1018.56 R11.1
  Top Layer w15: R11.1@73.12,1018 73.68,1018.56 R11.1@91.51,1036.39
  Top Layer w20: R11.1@91.51,1036.39 U1.11
NetU7_1: U7.1 USB1.2 | length 155.9
  Top Layer w8: USB1.2 79.57,515.59 U7.1
NetU7_3: U7.3 USB1.3 | length 176.3
  Top Layer w8: USB1.3 10,490 81.4,418.6 U7.3
NetU7_4: U7.4 U8.34 | length 305
  Top Layer w8: U7.4 254.09,418.6 U8.34
NetU7_6: U7.6 U8.33 | length 373.2
  Top Layer w6: U7.6 256.6,493.4 275,475 275,425.52 U8.33
RXD: J2.2 U8.38 | length 1359.5
  Top Layer w6: v1(367.56,-28.49) 367.56,119.83 U8.38 ; v1(1115,105) 1220,210 1323,210 J2.2
  Bottom Layer w6: v1(367.56,-28.49) 371.51,-32.44 478.25,-32.44 523.81,-78 908.98,-78 958.49,-28.49 1076.98,90 1090,90 1105,105 v1(1115,105)
RXLED: U8.48
SCK: U6.2 U8.20 | length 261.1
  Top Layer w6: U8.20 719,387.76 719,393.7 721,395.7 721,426 v1(725,430)
  Bottom Layer w6: U6.2 661.18,458.86 690.04,430 v1(725,430)
SCL: j1.3 U8.32 | length 1256.8
  Top Layer w6: v1(430.56,705.56) 438.56,705.56 445,699.12 445,357 430,342 430,298.36 U8.32 ; j1.3 775,985 v1(845,915)
  Bottom Layer w6: v1(430.56,705.56) 430.56,756.3 404,782.86 404,800.26 416.3,812.56 433.7,812.56 436.26,810 457.45,810 465.89,801.56 552.56,801.56 585,834 709.6,834 745.6,870 830,870 845,885 v1(845,915)
SDA: j1.4 U8.31 | length 1118.5
  Top Layer w6: U8.31 456.56,299.64 456.56,330 458.56,332 458.56,821.5 471.62,834.56 v1(479.56,834.56)
  Bottom Layer w6: v1(479.56,834.56) 492.29,834.56 503.73,846 704.63,846 742.19,883.55 742.19,987.19 767,1012 794.88,1012 802.88,1020 835,1020 j1.4
STEP: J2.9 Q1.3 R3.1 | length 524.6
  Top Layer w6: v1(1110,559.56) Q1.3@1110,595 ; Q1.3 Q1.3@1110,595 ; J2.9 1110,697 Q1.3@1110,595
  Bottom Layer w6: v1(1110,559.56) R3.1
SWCLK: J5.4 U8.45 | length 660.7
  Top Layer w6: v1(469.56,-53.44) 469.56,26.96 U8.45
  Bottom Layer w6: J5.4 90,140 157.94,72.06 283.44,-53.44 v1(469.56,-53.44)
SWDIO: J5.2 U8.46 | length 572.9
  Top Layer w6: v1(501.56,-5.58) 501.56,31.12 U8.46
  Bottom Layer w6: J5.2 140,106.97 246.7,0.27 409.71,0.27 415.56,-5.58 v1(501.56,-5.58)
TXD: J2.3 J5.6 U8.37 | length 2413.2
  Top Layer w6: J5.6 76.41,163.59 370.68,163.59 387.56,180.47 U8.37 ; v1(1110,-125) 1165,-180 1308,-180 1405.56,-82.44 1405.56,296.56 J2.3
  Bottom Layer w6: J5.6 40,165 123.44,81.56 330,-125 v1(1110,-125)
TXLED: U8.39
USBHOSTEN: R4.1 U8.41 | length 121.1
  Top Layer w6: v1(411.56,56.56) 427.56,72.56 427.56,96.32 U8.41
  Bottom Layer w6: R4.1 381.57,56.56 v1(411.56,56.56)
V3.3: C4.1 C5.1 C6.1 C7.1 C8.1 C9.1 C10.1 j1.2 J2.4 J5.1 Q1.1 Q2.2 Q3.1 Q4.1 R1.2 R8.2 R9.2 R15.2 R17.2 U2.5 U8.6 U8.17 U8.36 U8.44 | length 5094.2
  Top Layer w6: v1(310,540) 395,455 v1(395,345) ; v1(362.43,216.65) U8.36 ; v1(448.56,27.56) 448.56,33.8 U8.44 ; U8.6 691.2,65 731.42,65 v1(745.56,50.86) ; j1.2@683.7,1051.3 683.7,986 866.38,803.32 v1@866.38,780.99 ; U8.17 686.64,271.64 730,315 v1(740,315) ; v1(861.97,785.39) v1@866.38,780.99 ; v1(1013.56,501.56) 1011.77,499.77 Q3.1 ; Q4.1 991.6,297.4 956.56,332.44 956.56,444.24 981.97,469.66 ; Q1.1 993.56,632.4 ; v1@866.38,780.99 R1.2 926.56,780.99 937.39,770.16 U2.5 985.56,770.16 985.56,640.4 993.56,632.4 ; 981.97,469.66 984.72,472.4 Q3.1 ; 981.97,469.66 962.07,489.56 962.07,608.91 993.56,632.4 ; 981.97,469.66 Q3.1
  Bottom Layer w6: J5.1 166.74,250 218.43,198.32 218.43,153.56 ; R8.2 218.43,153.56 ; v1(310,540) 320.43,529.57 Q2.2 347.6,503.35 360.39,490.56 C8.1 ; v1(362.43,216.65) v1@364.08,215 ; v1(395,345) 395.4,344.6 C7.1 377.56,215 ; v1@443.56,32.56 v1(448.56,27.56) ; v1(740,315) 715,315 684.61,284.61 C6.1 684.61,111.81 v1(745.56,50.86) ; C10.1 957.56,474.61 975.59,456.58 R15.2@1013.56,456.58 ; C9.1 941.56,780.39 936.56,785.39 C5.1 v1(861.97,785.39) 834.56,785.39 807.56,758.39 807.56,317.56 745.56,255.56 v1(745.56,50.86) ; v1(1013.56,501.56) R15.2@1013.56,456.58 ; R9.2 1033.56,621.58 1042.56,612.58 1042.56,531.12 1015,503.56 R15.2 ; R17.2 1042.56,286.58 1042.56,447.58 1033.56,456.58 ; J2.4 1241.56,444.56 1224.56,461.56 1064.54,461.56 1059.56,456.58 1033.56,456.58 ; 218.43,153.56 279.87,215 v1@364.08,215 ; 357.56,33.28 358.28,32.56 ; 357.56,33.28 357.56,32.56 358.28,32.56 ; 357.56,33.28 357.56,195 377.56,215 ; 358.28,32.56 364.28,26.56 441.26,26.56 484.7,70 C4.1 510.39,43.56 661.74,43.56 691.3,14 708.7,14 v1(745.56,50.86) ; v1@364.08,215 377.56,215 ; R15.2@1013.56,456.58 R15.2 ; R15.2 1033.56,456.58
VBUS: D1.1 R6.2 U7.5 USB1.1 | length 1900.2
  Top Layer w6: USB1.1 26.18,541.18 45,560 v1(113.43,560) ; U7.5 243.12,456 v1(253.56,445.56) ; v1(508,531.44) 534.44,505 790,505 845,560 v1(870,560) ; v1(1075,685) 1075,724.79 1099.56,749.35 1099.56,895.53 1075,920.09 D1.1
  Bottom Layer w6: v1(253.56,445.56) 121.56,445.56 113.43,453.69 113.43,485 v1(113.43,560) 250.3,560 331.23,640.93 400.54,640.93 508,533.47 v1(508,531.44) ; v1(870,560) 995,685 v1(1075,685)
VIN: C1.1 D1.2 J2.10 R3.2 R14.2 R16.2 | length 1857.8
  Top Layer w6: D1.2 1207.74,1038.74 1213.56,1044.56 J2.10
  Bottom Layer w6: R16.2 1115,361 1148.56,394.56 1385.56,394.56 1405.56,414.56 1405.56,473.56 1386.56,492.56 1315.56,492.56 1309.58,486.58 R14.2 1110,523.56 1137.56,551.12 1137.56,638.58 1129.56,646.58 R3.2 1110,696.56 1147.56,734.12 1147.56,926.53 1119.56,954.53 1119.56,1024.61 C1.1 1240.56,1024.61 1260.51,1044.56 J2.10
VMOT: C13.1 C21.1 J3.1 U1.9 U1.16 | length 2578.5
  Top Layer w6: v1(189,873) v1@212.12,873 ; v1(190,1149) 206.86,1132.14 219.86,1132.14 ; C21.1@191,1273 192.56,1273 192.56,1271.44 C21.1@192.56,1270 ; 202,1387 168.56,1387 168.56,1270 C21.1@192.56,1270 ; C21.1@206,1273 323.56,1390.56 778.44,1390.56 784.44,1390.56 J3.1 ; C21.1 194,1270 C21.1@192.56,1270 ; U1.16 195.56,908.43 195.56,889.56 v1@212.12,873 ; C13.1 260.39,862.17 249.56,873 v1(247,873) v1(218,873) v1@212.12,873
  Top Layer w20: U1.9 219.86,1132.14
  Top Layer w50: C21.1@191,1273 192.56,1271.44 C21.1@194,1270 ; 202,1387 206,1391 ; C21.1@206,1273 206,1391 ; J3.1@891,1278 877,1292 778.44,1390.56 778,1391 206,1391
  Top Layer w60: v1@194,1158 C21.1@194,1270
  Bottom Layer w60: v1(189,873) v1(218,873) v1(247,873) ; v1@193,877 193,1182 v1(193,1217)
  other v1: 189,1182
pads on no net: J5.7 J5.8 J5.9 U6.6 U6.7 U6.8 U6.9 U6.10 U6.14

## Polygon pours and split planes (outlines as drawn)
GND on Bottom Layer "GND_bot" (solid, remove dead copper, pour order 8): -216,606 419,606 420,607 420,873 1439,873 1492,926 1494,928 1494,1469 -222,1469 -234,1457 -264,1427 -264,606
GND on Bottom Layer "Bottom Layer-No Net" (solid, remove dead copper, pour order 10): -222.44,1434 -220.44,1432 1434,1432 1434,-206.44 1418,-222.44 1414.44,-226 -221,-226
VMOT on Top Layer "vmot" (solid, remove dead copper, pour order 4): 195,905 175,885 175,857 173,855 175,857 260,857 260,899 255,904 250,909 249,909
GND on Top Layer "Top_GND" (solid, remove dead copper, pour order 12): -188,624 404,624 420,640 467,687 467,852 467,897 563,993 577,979 982,979 1383,979 928,979 928,1112 932.56,1334.56 928,1339.12 937.12,1339.12 937.12,1480 -244,1513 -244,618 -243,617

## Keep-outs
Keep-Out Layer:
  the board outline again, w10

## Other copper
Top Layer:
  pour cut-out: 630,1350 725,1350 725,1245 630,1245
  pour cut-out: 620,1105 620,1010 615,1005 608,1012 537.53,1012 537.53,1102.47 535,1105
  pour cut-out: 380,1300 395,1300 525,1300 525,1240 385,1240
  text "Top Copper" at 195.76,1772.5 h50
Bottom Layer:
  pour cut-out: -280,925 -275,920 170,920 170,890 165,895 -265,895
  pour cut-out: 431.55,798.56 753.56,798.56 756.56,795.56 756.56,396.56 433.56,396.56 431.56,398.56 432.56,399.56
  pour cut-out: 635,1340 725,1340 725,1250 635,1250
  pour cut-out: 530,1105 530,1015 623.56,1015 623.56,1101.44 620,1105
  text "Bottom Copper" at 179.76,1764.5 h50

## Silkscreen, mask and mechanical layers (free items; w line width, h text height)
Top Overlay:
  lines w10: 595,595 625,625 ; 595,625 625,595
  text "Top Silkscreen" at 179.76,1787.5 h50
  text "-" at 495,1355 h70
  text "+" at 1040,1335 h80
  text "VIN" at 1140,1038.74 h30
  text "STP" at 1135,940 h30
  text "DIR" at 1135,825 h30
  text "9/29/2016" at 446,785 h40
  text "RESET" at 95,720 h39.37
  text "ERROR" at 1085,720 h30
  text "Misfit Tech" at 375,695 h50
  text "GND" at 1140,630 h30
  text "D3" at 1160,525 h30
  text "Nano Zero Stepper" at 315,480 h40
  text "V3.3" at 1145,370 h30 r45
  text "TX" at 1160,315 h30
  text "RX" at 1160,223 h30
  text "GND" at 1130,130 h30
Bottom Overlay:
  text "Bottom Silkscreen" at 195.76,1764.5 h50
Top Paste:
  text "Top Paste" at 301.76,1764.5 h50
Bottom Paste:
  text "Bottom Paste" at 225.76,1756.5 h50
Top Solder:
  text "Top Solder" at 233.76,1779.5 h50
Bottom Solder:
  rectangle: 275,905 405,1155
  text "Bottom Solder" at 240.76,1802.5 h50
  text "Board Outline" at 217.76,1787.5 h50
Drill Guide:
  text "Drill Guide" at 332.76,1794.5 h50

## Dimensions
1330.02,1431.1 to 1333.56,-222.44 on Keep-Out Layer
-222.44,1334.56 to 1431.1,1330.02 on Keep-Out Layer